# EAGLE board main (EAGLE 8.3.1)
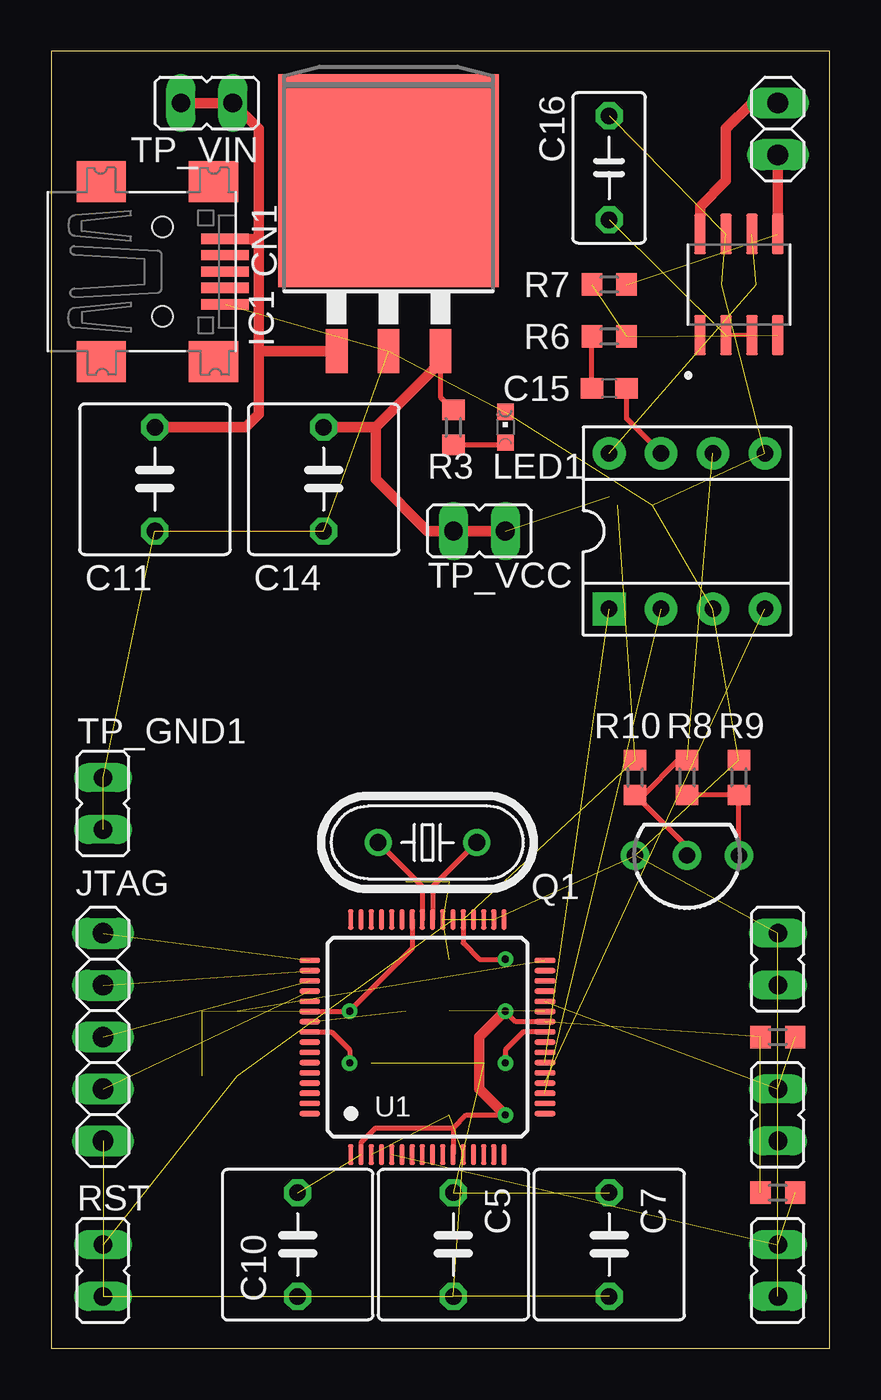
[diagram p0: board, top side]
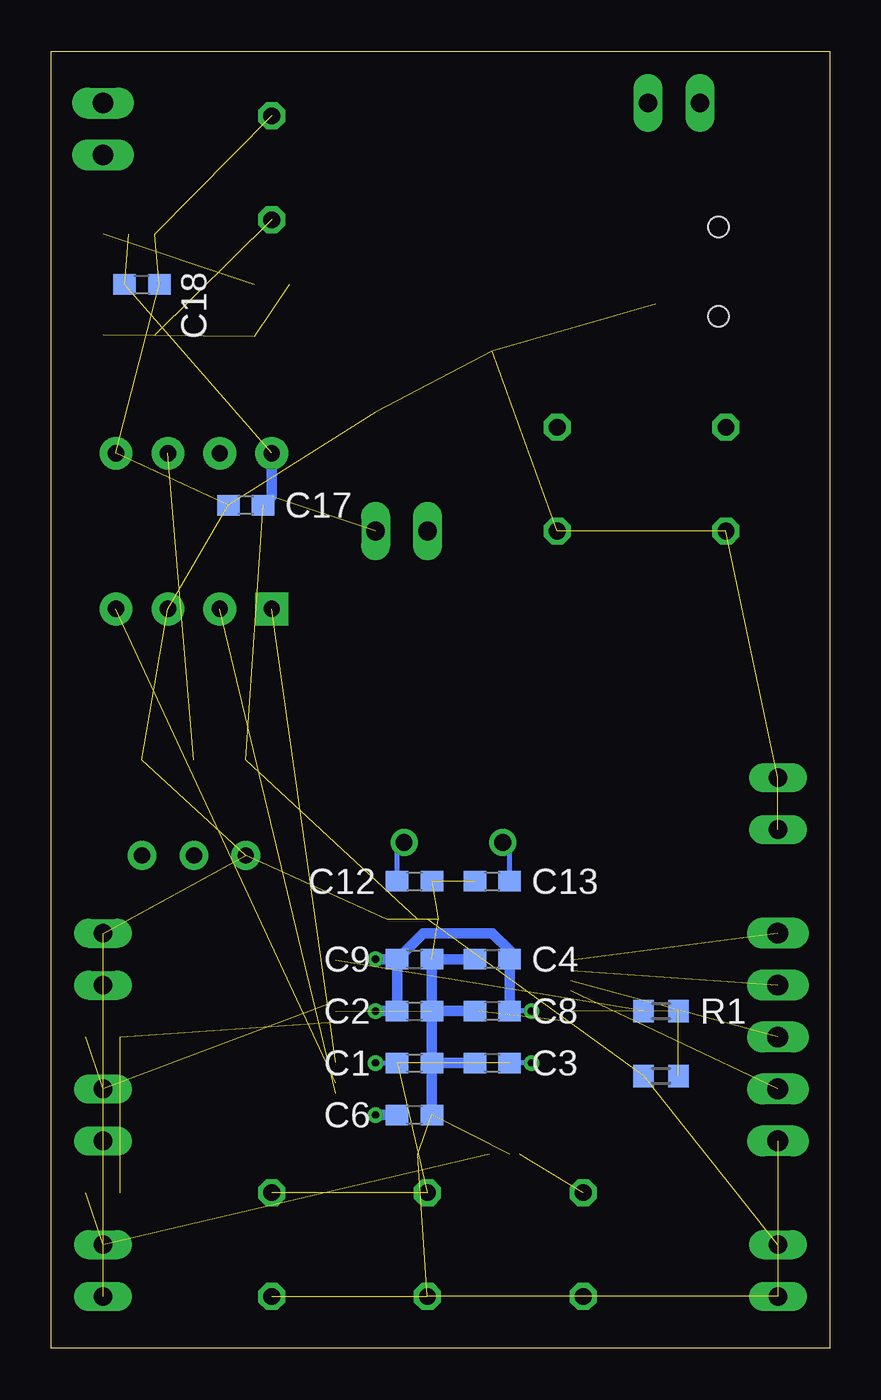
[diagram p1: board, bottom side, seen from below]

Size 38.1 x 63.5 mm. Coordinates in mm from the lower left corner, seen from the top.
Outline: 0,0 38.1,0 38.1,63.5 0,63.5 0,0
Copper layers (1*16): Top 0.035mm / dielectric 1.5mm / Bottom 0.035mm
Design rules "default": minimum track width 6mil, minimum drill 0.35mm, track to track 6mil, track to pad 6mil, pad to pad 6mil, via to via 6mil, smd to smd 6mil, copper to edge 40mil, drill to drill 6mil, minimum pad ring 10mil, minimum via ring 8mil, stop-mask expansion 4mil, vias tented up to drill 0mil, thermal gap 10mil

## Footprints (pad centres in the part's own frame; a part is rotated, then mirrored left to right if it is on the bottom)
JP1 = drill 0.914 long: 1 0,-1.27; 2 0,1.27
C0603 = smd 1.1 x 1: 1 -0.85,0; 2 0.85,0
C050-075X075 = drill 0.813 octagon: 1 -2.54,0; 2 2.54,0
C050-035X075 = drill 0.813 octagon: 1 -2.54,0; 2 2.54,0
USB-MINIB = smd 0.5 x 2.308: D+ 0,4.064; D- -0.8,4.064; GND 1.6,4.064; ID 0.8,4.064; VBUS -1.6,4.064 | smd 2 x 2.4: GND1 -4.4,-2; GND2 -4.4,3.5; GND3 4.4,3.5; GND4 4.4,-2 | hole 1: -2.2,1; 2.2,1
TO263-3 = smd 1.067 x 2.159: 1 -2.54,-5.791; 2 0,-5.791; 3 2.54,-5.791 | smd 10.8 x 10.41: TAB 0,2.54
LP_O-PBCY-W3 = drill 0.8 pad 1.4: 1 -2.54,0; 2 0,0; 3 2.54,0
1X05 = drill 1.016 long: 1 -5.08,0; 2 -2.54,0; 3 0,0; 4 2.54,0; 5 5.08,0
CHIPLED_0603 = smd 0.8 x 0.8: A 0,-0.75; C 0,0.75
HC49U-V = drill 0.813: 1 -2.413,0; 2 2.413,0
R0603 = smd 1 x 1.1: 1 -0.85,0; 2 0.85,0
1X02 = drill 1.016 long: 1 -1.27,0; 2 1.27,0
LQFP64 = smd 0.25 x 1: 1 -3.75,-5.75; 2 -3.25,-5.75; 3 -2.75,-5.75; 4 -2.25,-5.75; 5 -1.75,-5.75; 6 -1.25,-5.75; 7 -0.75,-5.75; 8 -0.25,-5.75; 9 0.25,-5.75; 10 0.75,-5.75; 11 1.25,-5.75; 12 1.75,-5.75; 13 2.25,-5.75; 14 2.75,-5.75; 15 3.25,-5.75; 16 3.75,-5.75; 33 3.75,5.75; 34 3.25,5.75; 35 2.75,5.75; 36 2.25,5.75; 37 1.75,5.75; 38 1.25,5.75; 39 0.75,5.75; 40 0.25,5.75; 41 -0.25,5.75; 42 -0.75,5.75; 43 -1.25,5.75; 44 -1.75,5.75; 45 -2.25,5.75; 46 -2.75,5.75; 47 -3.25,5.75; 48 -3.75,5.75 | smd 1 x 0.25: 17 5.75,-3.75; 18 5.75,-3.25; 19 5.75,-2.75; 20 5.75,-2.25; 21 5.75,-1.75; 22 5.75,-1.25; 23 5.75,-0.75; 24 5.75,-0.25; 25 5.75,0.25; 26 5.75,0.75; 27 5.75,1.25; 28 5.75,1.75; 29 5.75,2.25; 30 5.75,2.75; 31 5.75,3.25; 32 5.75,3.75; 49 -5.75,3.75; 50 -5.75,3.25; 51 -5.75,2.75; 52 -5.75,2.25; 53 -5.75,1.75; 54 -5.75,1.25; 55 -5.75,0.75; 56 -5.75,0.25; 57 -5.75,-0.25; 58 -5.75,-0.75; 59 -5.75,-1.25; 60 -5.75,-1.75; 61 -5.75,-2.25; 62 -5.75,-2.75; 63 -5.75,-3.25; 64 -5.75,-3.75
SOIC127P600X175-8N = smd 1.97 x 0.57: 1 -2.475,1.905; 2 -2.475,0.635; 3 -2.475,-0.635; 4 -2.475,-1.905; 5 2.475,-1.905; 6 2.475,-0.635; 7 2.475,0.635; 8 2.475,1.905
DIL08 = drill 0.8 pad 1.6 square: 1 -3.81,-3.81 | drill 0.8 pad 1.6: 2 -1.27,-3.81; 3 1.27,-3.81; 4 3.81,-3.81; 5 3.81,3.81; 6 1.27,3.81; 7 -1.27,3.81; 8 -3.81,3.81

## Placement (x,y rotation side)
BTN0  [JP1]  35.56,11.43 180 top
BTN4  [JP1]  35.56,3.81 180 top
C1  0.1uF  [C0603]  20.32,13.97 0 bottom
C2  0.01uF  [C0603]  20.32,16.51 0 bottom
C3  0.1uF  [C0603]  16.51,13.97 180 bottom
C4  0.01uF  [C0603]  16.51,19.05 180 bottom
C5  1uF  [C050-075X075]  19.68,5.08 270 top
C6  0.01uF  [C0603]  20.32,11.43 0 bottom
C7  2.2uF  [C050-075X075]  27.3,5.08 270 top
C8  0.1uF  [C0603]  16.51,16.51 180 bottom
C9  0.1uF  [C0603]  20.32,19.05 0 bottom
C10  1uF  [C050-075X075]  12.06,5.08 270 top
C11  4.7uF  [C050-075X075]  5.08,42.55 270 top
C12  10pF  [C0603]  20.32,22.86 0 bottom
C13  10pF  [C0603]  16.51,22.86 180 bottom
C14  4.7uF  [C050-075X075]  13.34,42.55 270 top
C15  0.1uF  [C0603]  27.3,46.99 180 top
C16  3.3uF  [C050-035X075]  27.3,57.78 90 top
C17  0.1uF  [C0603]  28.57,41.27 180 bottom
C18  0.1uF  [C0603]  33.66,52.07 0 bottom
CN1  [USB-MINIB]  4.45,52.7 270 top
IC1  LM2937  [TO263-3]  16.51,54.61 0 top
IC2  LM4041CILPRLP  [LP_O-PBCY-W3]  31.11,24.13 180 top
JTAG  [1X05]  2.54,15.24 270 top
LED1  [CHIPLED_0603]  22.23,45.09 0 top
Q1  16MHz  [HC49U-V]  18.41,24.77 180 top
R1  1M  [R0603]  8.26,16.51 0 bottom
R2  10K  [R0603]  8.26,13.34 0 bottom
R3  4.7K  [R0603]  19.68,45.09 90 top
R4  10k  [R0603]  35.56,15.24 0 top
R5  10k  [R0603]  35.56,7.62 0 top
R6  2.2k  [R0603]  27.3,49.53 0 top
R7  2.2k  [R0603]  27.3,52.07 0 top
R8  47k  [R0603]  31.11,27.94 270 top
R9  10k  [R0603]  33.66,27.94 90 top
R10  2k  [R0603]  28.57,27.94 90 top
RST  [JP1]  2.54,3.81 180 top
SPK  [1X02]  35.56,59.69 90 top
TP_GND1  [JP1]  2.54,26.67 180 top
TP_GND2  [JP1]  35.56,19.05 180 top
TP_VCC  [JP1]  20.95,40.01 270 top
TP_VIN  [JP1]  7.62,60.96 90 top
U1  TM4C1233H6PM  [LQFP64]  18.41,15.24 0 top
U2  TPA731D  [SOIC127P600X175-8N]  33.66,52.07 90 top
U3  TLV5616  [DIL08]  31.11,40.01 0 top

## Library data of the parts
BTN0 BTN4 RST TP_GND1 TP_GND2 TP_VCC TP_VIN = jumper
C1-C18 R1-R10 = rcl
CN1 LED1 = adafruit
IC1 = linear
IC2 = LM4041CILPR; AVAILABILITY: Unavailable; DESCRIPTION: Adjustable Precision Micropower Shunt Voltage Reference, 0.5% accuracy 3-TO-92 -40 to 85; MF: Texas Instruments; MP: LM4041CILPR; PACKAGE: TO-92 Texas Instruments; PRICE: None
JTAG SPK = pinhead
Q1 = adafruit; OC_FARNELL: 1666969; OC_NEWARK: unknown
U1 = ti-tiva
U2 = TPA731D; AVAILABILITY: Unavailable; DESCRIPTION: 700-mW Mono, Differential Input, Class-AB Audio Amplifier with Active High Shutdown 8-SOIC -40 to 85; MF: Texas Instruments; MP: TPA731D; PACKAGE: SOIC-8 Texas Instruments; PRICE: None
U3 = TLV5616; AVAILABILITY: Unavailable; DESCRIPTION: 12 Bit Digital to Analog Converter 1 8-SOIC; MF: Texas Instruments; MP: TLV5616; PACKAGE: SOIC-8 Texas Instruments; PRICE: None

## Nets
5V_IN: C11.1 CN1.VBUS IC1.1 TP_VIN.1 TP_VIN.2
AMP_DC_FILTER: C15.2 R6.1
AMP_IN+: C16.1 U2.2 U2.3
AMP_IN-: R6.2 R7.1 U2.4
FSS: U1.20 U3.4
GND: BTN0.2 BTN4.2 C1.2 C2.2 C3.2 C4.2 C5.2 C6.2 C7.2 C8.2 C9.2 C10.2 C11.2 C12.2 C13.2 C14.2 C16.2 C17.2 C18.2 CN1.GND IC1.2 IC2.3 JTAG.5 LED1.C R9.2 RST.2 TP_GND1.1 TP_GND1.2 TP_GND2.1 TP_GND2.2 U1.3 U1.12 U1.27 U1.34 U1.35 U1.39 U1.55 U2.7 U3.3 U3.5
LED_RESIST: LED1.A R3.1
MOSI: U1.22 U3.1
OSC0: C12.1 Q1.1 U1.40
OSC1: C13.1 Q1.2 U1.41
PF0: BTN0.1 R4.2 U1.28
PF4: BTN4.1 R5.2 U1.5
RST: R2.1 RST.1 U1.38
SCLK: U1.19 U3.2
TCK: JTAG.4 U1.52
TDI: JTAG.2 U1.50
TDO: JTAG.1 U1.49
TMS: JTAG.3 U1.51
VCC: C2.1 C4.1 C6.1 C8.1 C9.1 C10.1 C14.1 C17.1 C18.1 IC1.3 R1.2 R2.2 R3.2 R4.1 R5.1 R10.2 TP_VCC.1 TP_VCC.2 U1.2 U1.11 U1.26 U1.37 U1.42 U1.54 U2.6 U3.8
VDAC: C15.1 U3.7
VDDC: C1.1 C3.1 C5.1 C7.1 U1.25 U1.56
VO+: R7.2 SPK.1 U2.5
VO-: SPK.2 U2.8
VREF: IC2.2 R8.1 R10.1 U3.6
VREF_FEEDBACK: IC2.1 R8.2 R9.1
WAKE: R1.1 U1.32

## Tracks (layer width: path | path; a pad name or v marks a point on that pad's centre or on a via)
5V_IN
  Top 0.508: 10.16,53.98 9.83,54.3 CN1.VBUS | 10.16,53.98 10.16,48.88 | 10.16,48.88 10.16,45.72 9.53,45.09 C11.1 | 10.16,48.88 10.22,48.82 IC1.1 | 10.16,53.98 10.16,59.69 TP_VIN.1 TP_VIN.2
AMP_DC_FILTER
  Top 0.254: C15.2 R6.1
AMP_IN+  (1 unrouted)
  Top 0.203: U2.3 U2.2
AMP_IN-  (2 unrouted)
FSS  (1 unrouted)
GND  (33 unrouted)
  Bottom 0.508: C4.2 C9.2 C2.2 | C8.2 C2.2 | C3.2 C1.2 | C2.2 C1.2 | C1.2 C6.2
LED_RESIST
  Top 0.254: R3.1 22.12,44.23 LED1.A
MOSI  (1 unrouted)
OSC0
  Top 0.254: Q1.1 18.66,22.6 U1.40
  Bottom 0.254: C12.1 21.17,24.42 Q1.1
OSC1
  Top 0.254: Q1.2 18.16,22.6 U1.41
  Bottom 0.254: C13.1 15.66,24.42 Q1.2
PF0  (2 unrouted)
PF4  (2 unrouted)
RST  (2 unrouted)
SCLK  (1 unrouted)
TCK  (1 unrouted)
TDI  (1 unrouted)
TDO  (1 unrouted)
TMS  (1 unrouted)
VCC  (via drill 0.35)  (10 unrouted)
  Top 0.254: IC1.3 19.05,46.57 R3.2 | U1.26 22.75,15.99 v22.23,16.51 | U1.54 14.59,16.49 v14.61,16.51 17.66,19.57 U1.42 | 19.66,10.78 U1.11 | 19.66,10.78 20.32,11.43 v22.23,11.43 | U1.37 20.16,19.84 20.95,19.05 v22.23,19.05 | U1.2 15.16,10.09 15.88,10.79 19.64,10.79 19.66,10.78
  Top 0.508: IC1.3 19.05,48.26 15.88,45.09 | 15.88,45.09 C14.1 | TP_VCC.2 TP_VCC.1 18.41,40.01 15.88,42.55 15.88,45.09 | v22.23,16.51 20.95,15.24 20.95,12.7 v22.23,11.43
  Bottom 0.254: v14.61,16.51 C8.1
  Bottom 0.508: C9.1 C2.1 v22.23,16.51 | C8.1 C4.1 15.66,19.47 16.51,20.32 19.9,20.32 C9.1 | C6.1 v22.23,11.43 | C9.1 v22.23,19.05 | U3.8 27.3,41.7 C17.1
VDAC
  Top 0.254: U3.7 28.16,45.51 C15.1
VDDC  (via drill 0.35)  (3 unrouted)
  Top 0.254: U1.56 13.72,15.49 14.61,14.61 v14.61,13.97 | U1.25 23.11,15.49 22.23,14.61 v22.23,13.97
  Bottom 0.254: v22.23,13.97 C1.1 | v14.61,13.97 C3.1
VO+  (1 unrouted)
  Top 0.508: U2.5 SPK.1
VO-
  Top 0.508: U2.8 31.75,55.88 33.02,57.15 33.02,59.69 34.29,60.96 SPK.2
VREF  (1 unrouted)
  Top 0.254: IC2.2 31.11,24.55 R10.1 29,27.09 30.7,28.79 R8.1
VREF_FEEDBACK
  Top 0.254: IC2.1 R9.1 R8.2
WAKE  (1 unrouted)